# Altium PCB freedomport.PcbDoc
Units mil, origin at the board's own origin, x right, y up, seen from the top; angles counter-clockwise.
Board outline 685.04 x 582.68 mil, 4 copper layers (Top Layer, Layer 1, Layer 2, Bottom Layer), stack 42.156 mil thick; 26 components, 15 nets, 78 pads, 28 vias.
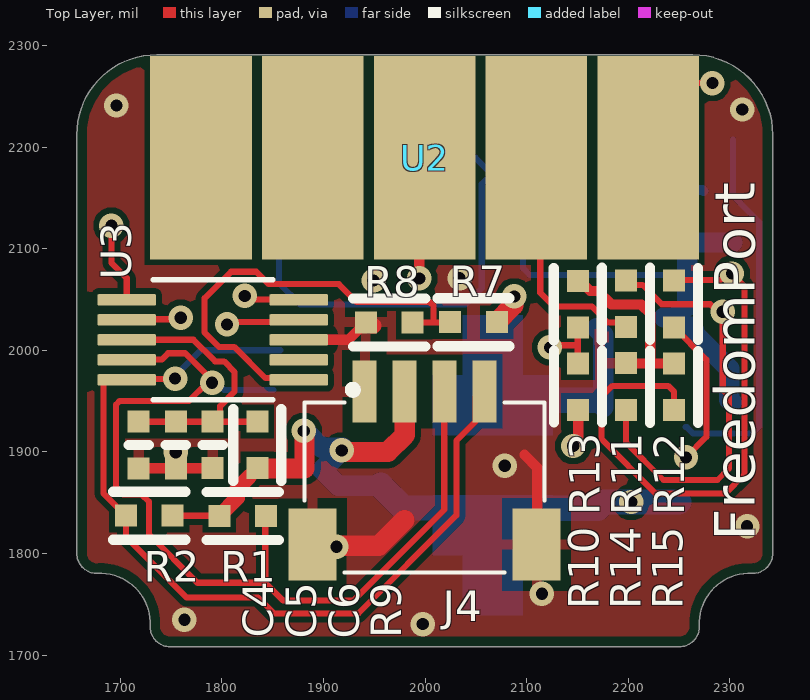
[diagram p0: Top Layer view]
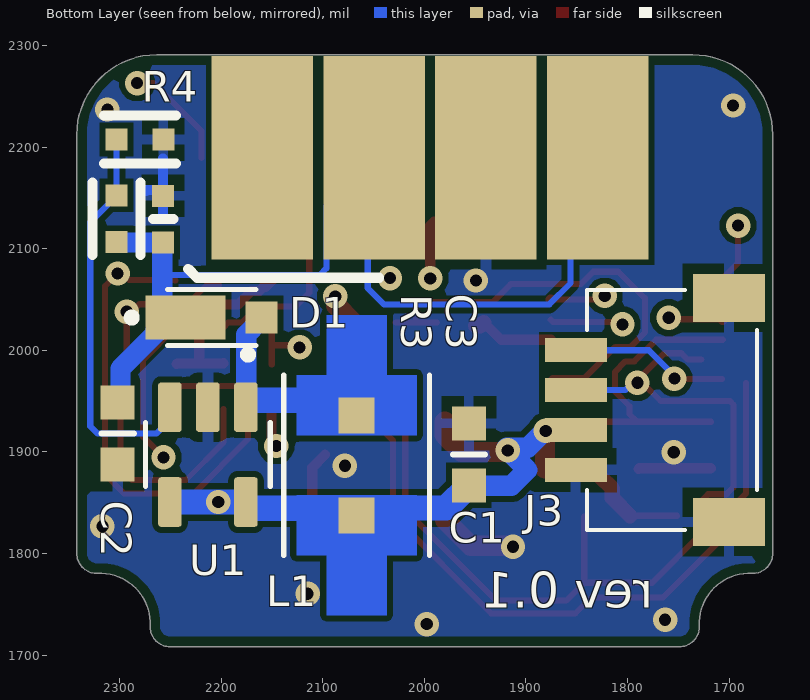
[diagram p1: Bottom Layer view, seen from below]
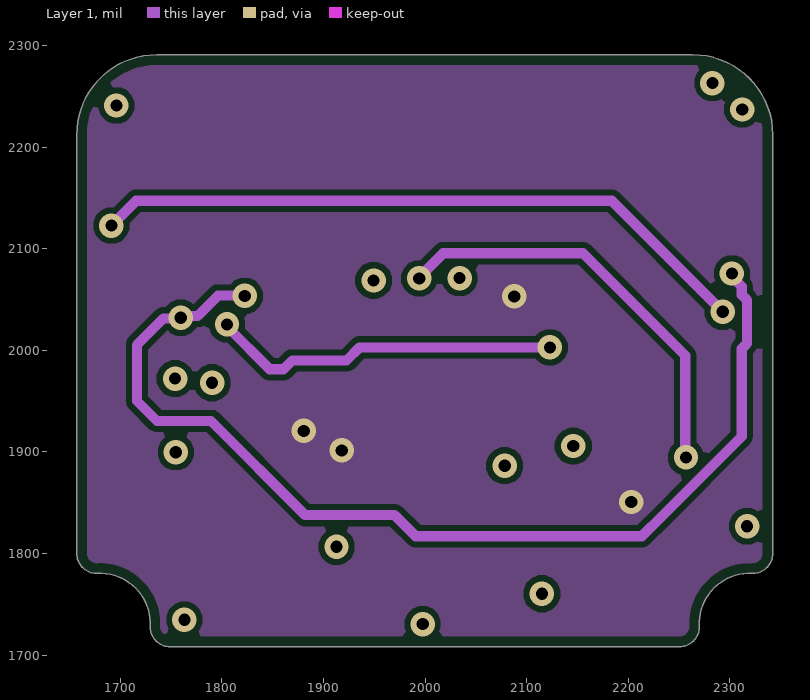
[diagram p2: Layer 1]
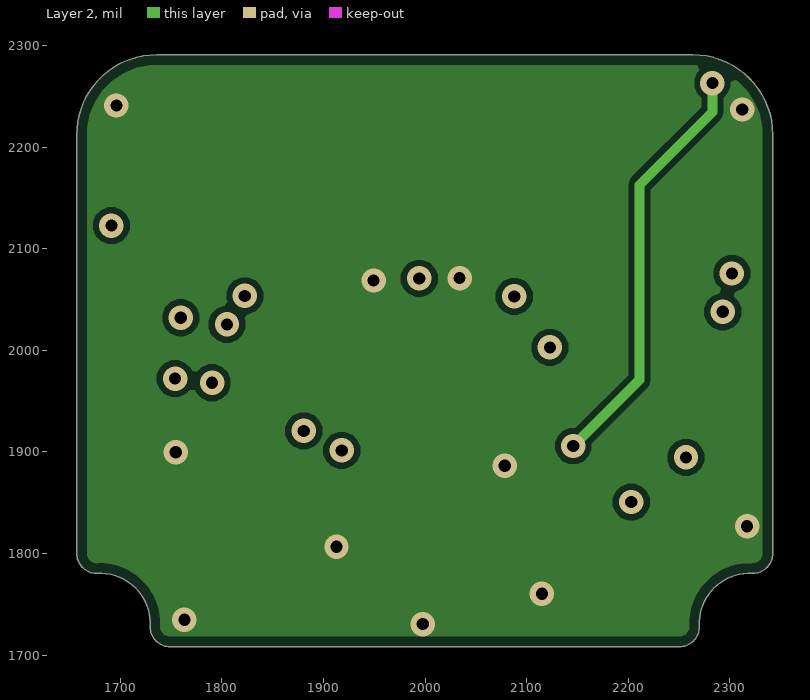
[diagram p3: Layer 2]
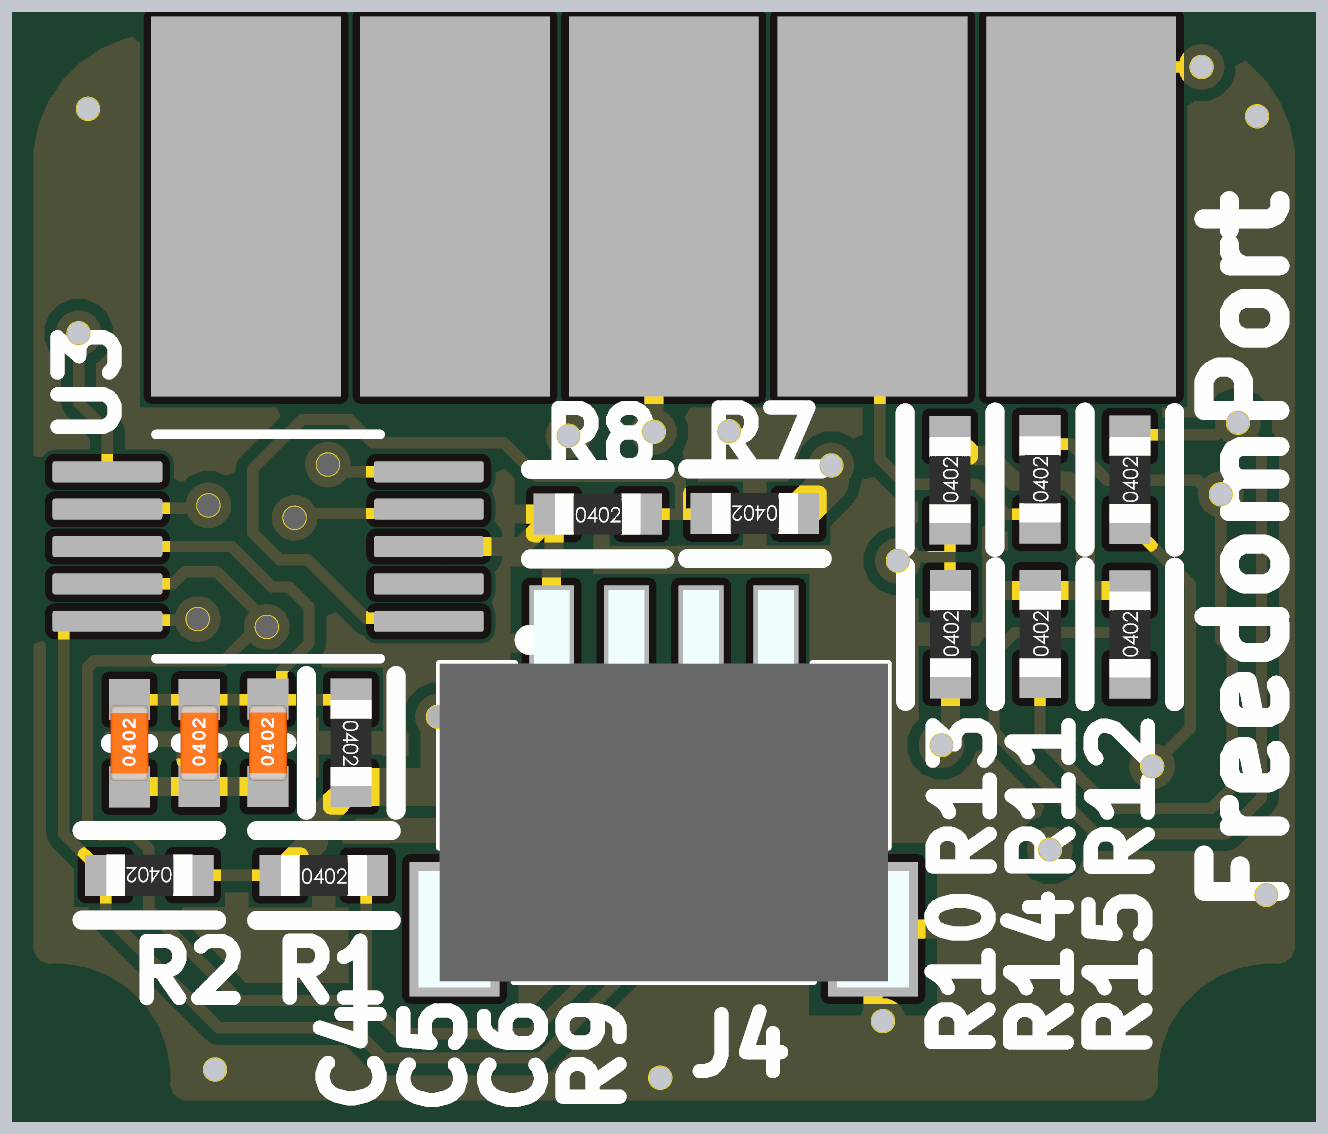
[diagram p4: 3D render of the assembled board from above, using the file's embedded part models]
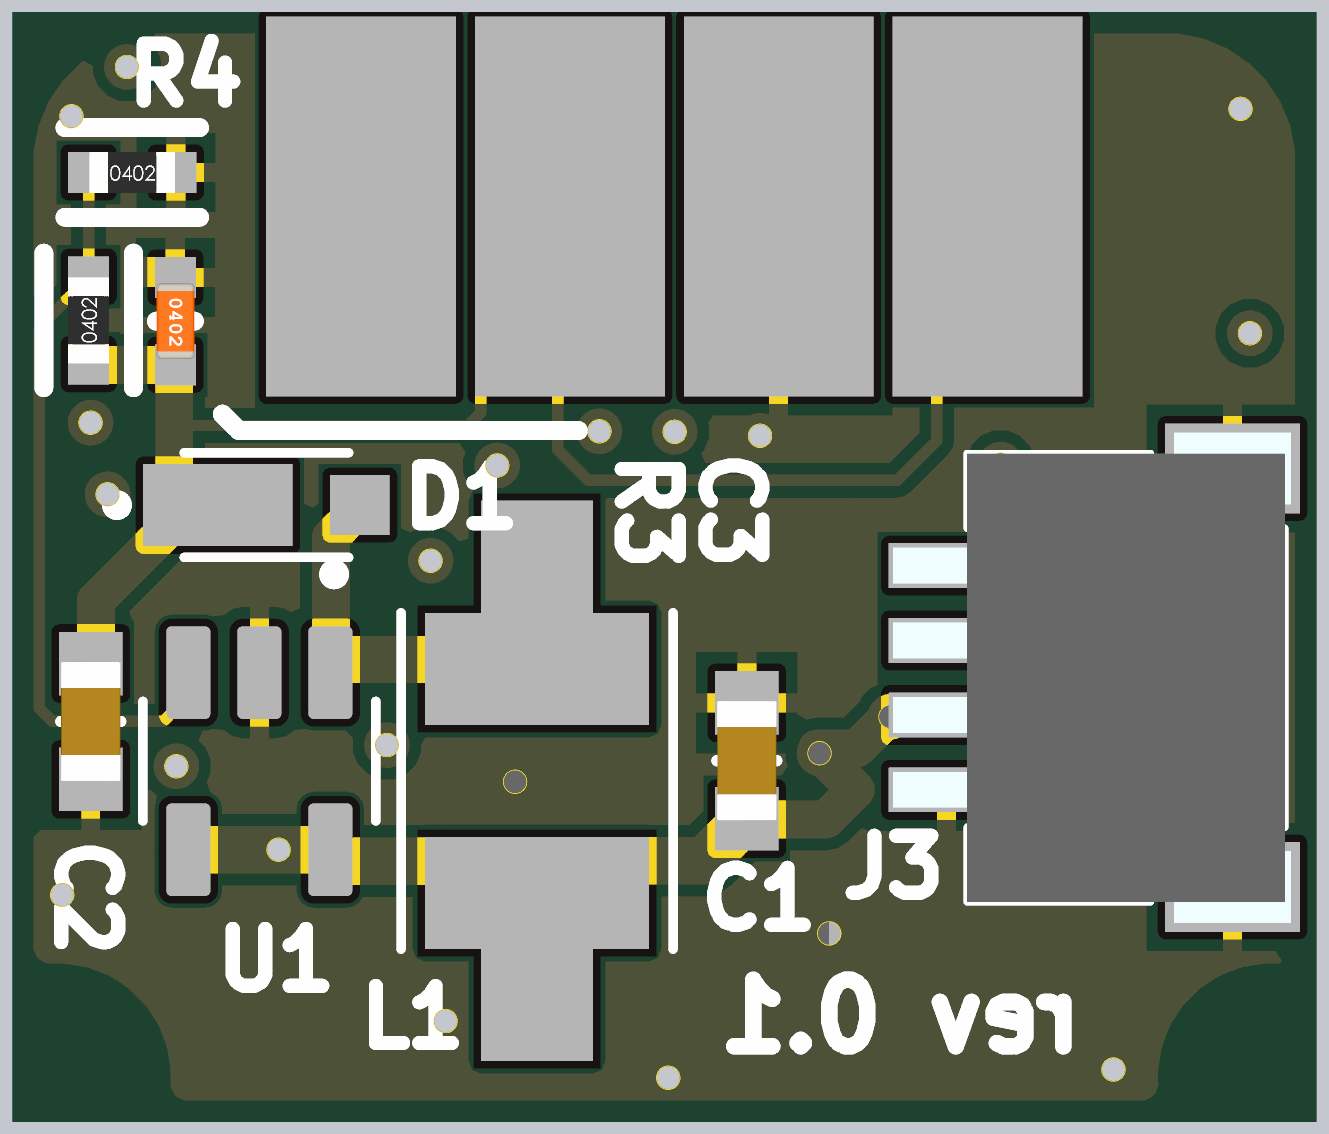
[diagram p5: 3D render of the assembled board from below, using the file's embedded part models]

## Layer stack, top to bottom
Top Solder: solder mask 0.4, Solder Resist, Dk 3.5
Top Layer: signal copper 1.4
Dielectric 2: prepreg 2.8, PP-006, Dk 4.1
Layer 1: signal copper 1.378
Dielectric 1: dielectric 31, FR-4, Dk 4.4
Layer 2: signal copper 1.378
Dielectric 3: prepreg 2.8, PP-006, Dk 4.1
Bottom Layer: signal copper 1.4
Bottom Solder: solder mask 0.4, Solder Resist, Dk 3.5

## Board outline
1677.76,1780.34 cw(c1676.79,1800) 1657.11,1800 1657.11,2212.06 cw(c1735.85,2212.06) 1735.85,2290.8 2263.41,2290.8 cw(c2263.41,2212.06) 2342.15,2212.06 2342.15,1800 cw(c2322.46,1800) 2321.5,1780.34 ccw(c2319.09,1731.18) 2269.93,1728.77 cw(c2250.27,1727.8) 2250.27,1708.12 1748.99,1708.12 cw(c1748.99,1727.8) 1729.33,1728.77 ccw(c1680.17,1731.18)

## Design rules (kind name [scope] priority, off if disabled: settings)
BoardOutlineClearance [All] p1: gap=10 ignorepadtopadclearanceinfootprint=FALSE except(0: Arc-SplitContinuation Track-SplitContinuation SMDPad-SplitContinuation THPad-SplitContinuation Via-SplitContinuation Fill-SplitContinuation Poly-SplitContinuation Region-SplitContinuation Text-SplitContinuation)
Clearance [All] p1: gap=6 ignorepadtopadclearanceinfootprint=FALSE
DiffPairsRouting [All] p1: maxlimit=8 minlimit=4 mostfreqgap=4 toplayer_minwidth=15 toplayer_maxwidth=25 toplayer_prefwidth=25 midlayer1_minwidth=15 midlayer1_maxwidth=25 midlayer1_prefwidth=25 midlayer2_minwidth=15 midlayer2_maxwidth=25 midlayer2_prefwidth=25 bottomlayer_minwidth=15 bottomlayer_maxwidth=25 bottomlayer_prefwidth=25 maxuncoupledlength=500
HoleSize [All] p1: absolutevalues=TRUE maxlimit=100 minlimit=7 maxpercent=80.000 minpercent=20.000
MinimumSolderMaskSliver [All] p1: minsoldermaskwidth=0
PolygonConnect PolygonConnect_1 [All] p1: thpad.connectstyle=Relief thpad.reliefconductorwidth=10 thpad.reliefentries=4 thpad.polygonreliefangle="90 Angle" thpad.airgapwidth=10 smdpad.connectstyle=Relief smdpad.reliefconductorwidth=10 smdpad.reliefentries=4 smdpad.polygonreliefangle="90 Angle" smdpad.airgapwidth=10 via.connectstyle=Direct via.reliefconductorwidth=10 via.reliefentries=4 via.polygonreliefangle="90 Angle" via.airgapwidth=10
RoutingVias [All] p1: holewidth=8 width=50 viastyle="Through Hole" minholewidth=7 minwidth=10 maxholewidth=28 maxwidth=50
SilkToSilkClearance [All] p1: silktosilkclearance=1
SilkToSolderMaskClearance [IsPad] p1: minsilkscreentomaskgap=1 clearancetoexposedcopper=TRUE
SolderMaskExpansion [All] p1: expansion=4 istentingtop=FALSE
Width [All] p1: maxlimit=100 minlimit=6 preferedwidth=10 toplayer_prefwidth=6 midlayer1_minwidth=10 midlayer1_maxwidth=10 midlayer2_minwidth=10 midlayer2_maxwidth=10 bottomlayer_prefwidth=6 minimp=50.000000 maximp=50.000000 favimp=50.000000
25 further rules are at their usual default settings.

## Components (designator, comment, footprint, x,y, rotation, side; value= is the part's Value field where it differs from the comment)
C1 "4.7µF" SMD-0603C 1956.23,1897.46 r0 bottom
C2 "10µF" SMD-0603C 2301.84,1918.13 r180 bottom
C3 "1µF" SMD-0402C 2257.25,2129 r0 bottom
C4 "1µF" SMD-0402C 1717.97,1906.63 r0 top
C5 "0.10µF" SMD-0402C 1754.75,1906.78 r0 top
C6 "4.7µF" SMD-0402C 1790.88,1906.86 r0 top
D1 "MSS1P4-M3/89A" DIODE_MSS1P4-M3/89A 2209.29,2032.12 r180 bottom
J3 "4208" 4208 1673.18,1940.17 r90 bottom
J4 "4208" 4208 1998.47,1781.6 r0 top
L1 "LQH43CN100K03L" IND_LQH43CN100K03L 2066.74,1886.77 r90 bottom
R1 "4.7k" SMD-0402-RES 1820.44,1836.98 r270 top
R2 "4.7k" SMD-0402-RES 1728.46,1837.08 r90 top
R3 "40.2k" SMD-0402-RES 2302.95,2129.38 r180 bottom
R4 "4.7k" SMD-0402-RES 2279.98,2207.36 r270 bottom
R7 "0.0" SMD-0402-RES 2047.49,2027.59 r90 top
R8 "0.0" SMD-0402-RES 1964.68,2027.35 r270 top
R9 "0.0" SMD-0402-RES 1834.78,1906.83 r180 top
R10 "124k" SMD-0402-RES 2150.5,1964.15 r0 top
R11 "124k" SMD-0402-RES 2197.65,2045.66 r0 top
R12 "124k" SMD-0402-RES 2245,2045.4 r0 top
R13 "47k" SMD-0402-RES 2150.24,2045.3 r0 top
R14 "47k" SMD-0402-RES 2197.8,1964.2 r0 top
R15 "47k" SMD-0402-RES 2244.98,1963.94 r0 top
U1 "MIC2288YD5-TR" SOT95P280X100-5N 2213.03,1897.21 r270 bottom
U2 "A-DS_9_LLZ" A-DS_9_LLZ 1999.42,2189.41 r270 top
U3 "ADS1015IDGST" SOP50P490X110-10N 1791,2010.27 r180 top

## Footprints (in the part's own frame and the unit in brackets; to place one, negate y for a bottom-side part, rotate by r counter-clockwise, add the part's x,y. Pads: shape width x height; smd on the part's side, far side on the other; paste and mask are expansions set on the pad)
4208 [mm]
  rect 0.6x1.55 smd: 1(-1.475,4.515) 2(-0.475,4.515) 3(0.525,4.515) 4(1.525,4.515)
  rect 1.2x1.8 smd: 5(-2.775,0.69) 6(2.825,0.69)
  silkscreen extent -2.97,-0.01 3.03,4.24, body extent -3.25,-0.09 3.31,5.23, height 3.15
A-DS_9_LLZ [mil]
  rect 200x100 smd: 1(0,220) 2(0,110) 3(0,0) 4(0,-110) 5(0,-220)
  rect 200x100 smd far side: 6(0,160) 7(0,50) 8(0,-60) 9(0,-170)
DIODE_MSS1P4-M3/89A [mm]
  rect 2x1.1 smd: 1(-0.65,0)
  rect 0.8x0.8 smd: 2(1.25,0)
  silkscreen extent -2.1,-0.7 1.1,0.7
IND_LQH43CN100K03L [mm]
  rect 0.9x0.9 smd paste-1 mask+0: 1(-1.25,0) 2(1.25,0)
  Top Layer region: -0.75,-1.5 -2.25,-1.5 -2.25,-0.75 -3.75,-0.75 -3.75,0.75 -2.25,0.75 -2.25,1.5 -0.75,1.5
  Top Layer region: 2.25,0.75 3.75,0.75 3.75,-0.75 2.25,-0.75 2.25,-1.5 0.75,-1.5 0.75,1.5 2.25,1.5
  silkscreen extent -2.25,-1.82 2.25,1.82
SMD-0402-RES [mm]
  rect 0.55x0.55 smd: 1(0,0.584) 2(0,-0.584)
  silkscreen extent -0.6,-0.9 0.6,0.9, body extent -0.28,-0.57 0.27,0.58, height 0.41
SMD-0402C [mm]
  rect 0.55x0.55 smd: 1(0,0.584) 2(0,-0.584)
  silkscreen extent -0.25,0 0.25,0, body extent -0.25,-0.51 0.25,0.51, height 0.51
SMD-0603C [mm]
  rect 0.85x0.85 smd: 1(0,0.775) 2(0,-0.775)
  silkscreen extent -0.4,0 0.4,0, body extent -0.4,-0.8 0.4,0.8, height 0.9
SOP50P490X110-10N [mm]
  rrect25% 1.47x0.28 smd: 1(-2.15,1) 2(-2.15,0.5) 3(-2.15,0) 4(-2.15,-0.5) 5(-2.15,-1) 6(2.15,-1) 7(2.15,-0.5) 8(2.15,0) 9(2.15,0.5) 10(2.15,1)
  silkscreen extent -3.6,-1.5 1.5,1.5
SOT95P280X100-5N [mm]
  rrect25% 1.24x0.59 smd: 1(-1.185,0.95) 2(-1.185,0) 3(-1.185,-0.95) 4(1.185,-0.95) 5(1.185,0.95)
  silkscreen extent -2.6,-1.56 0.8,1.56

## Part data
C1: library part GRM188R61C475KAAJD, "CAP CER 4.7UF 16V X5R 0603", Digi-Key Part Number=490-10481-1-ND, Manufacturer="Murata Electronics North America", Operating Temperature="-55°C ~ 85°C", Package / Case="0603 (1608 Metric)", Ratings=-, Temperature Coefficient=X5R, Tolerance=±10%, Voltage=16V, @ qty=0, Applications="General Purpose", Datasheets=http://www.murata.com/~/media/webrenewal/support/library/catalog/products/capacitor/mlcc/c02e.pdf, Factory Stock=0, Features="Derating Recommended", Height - Seated (Max)=-, Image=//media.digikey.com/Renders/Murata%20Renders/ZRB-SERIES-0402.jpg, Lead Spacing=-, Lead Style=-, Minimum Quantity=1, Mounting Type="Surface Mount, MLCC", Packaging="Cut Tape (CT)", Part Number=GRM188R61C475KAAJD, Part Status=Active, Quantity Available=5977, Series=GRM, Size / Dimension="0.063\" L x 0.031\" W (1.60mm x 0.80mm)", Thickness (Max)="0.037\" (0.95mm)", Unit Price (USD)=0.3
C2: library part GRM188R61E106MA73D, "CAP CER 10UF 25V X5R 0603", Digi-Key Part Number=490-7202-1-ND, Manufacturer="Murata Electronics North America", Operating Temperature="-55°C ~ 85°C", Package / Case="0603 (1608 Metric)", Ratings=-, Temperature Coefficient=X5R, Tolerance=±20%, Voltage=25V, @ qty=0, Applications="General Purpose", Datasheets=http://www.murata.com/~/media/webrenewal/support/library/catalog/products/capacitor/mlcc/c02e.pdf, Factory Stock=0, Features=-, Height - Seated (Max)=-, Image=//media.digikey.com/Renders/Murata%20Renders/ZRB-SERIES-0402.jpg, Lead Spacing=-, Lead Style=-, Minimum Quantity=1, Mounting Type="Surface Mount, MLCC", Packaging="Cut Tape (CT)", Part Number=GRM188R61E106MA73D, Part Status=Active, Quantity Available=169100, Series=GRM, Size / Dimension="0.063\" L x 0.031\" W (1.60mm x 0.80mm)", Thickness (Max)="0.031\" (0.80mm)", Unit Price (USD)=0.36
C3: library part GRM155R61E105KA12D, "CAP CER 1UF 25V X5R 0402", Digi-Key Part Number=490-10017-1-ND, Manufacturer="Murata Electronics North America", Operating Temperature="-55°C ~ 85°C", Package / Case="0402 (1005 Metric)", Ratings=-, Temperature Coefficient=X5R, Tolerance=±10%, Voltage=25V, @ qty=0, Applications="General Purpose", Datasheets=http://www.murata.com/~/media/webrenewal/support/library/catalog/products/capacitor/mlcc/c02e.pdf, Factory Stock=0, Features="Derating Recommended", Height - Seated (Max)=-, Image=//media.digikey.com/Renders/Murata%20Renders/ZRB-SERIES-0402.jpg, Lead Spacing=-, Lead Style=-, Minimum Quantity=1, Mounting Type="Surface Mount, MLCC", Packaging="Cut Tape (CT)", Part Number=GRM155R61E105KA12D, Part Status=Active, Quantity Available=2355, Series=GRM, Size / Dimension="0.039\" L x 0.020\" W (1.00mm x 0.50mm)", Thickness (Max)="0.022\" (0.55mm)", Unit Price (USD)=0.1
C4: library part GRM155R61A105KE15D, "CAP CER 1UF 10V X5R 0402", Digi-Key Part Number=490-3890-1-ND, Manufacturer="Murata Electronics North America", Operating Temperature="-55°C ~ 85°C", Package / Case="0402 (1005 Metric)", Ratings=-, Temperature Coefficient=X5R, Tolerance=±10%, Voltage=10V, @ qty=0, Applications="General Purpose", Datasheets=http://www.murata.com/~/media/webrenewal/support/library/catalog/products/capacitor/mlcc/c02e.pdf, Factory Stock=0, Features=-, Height - Seated (Max)=-, Image=//media.digikey.com/Renders/Murata%20Renders/ZRB-SERIES-0402.jpg, Lead Spacing=-, Lead Style=-, Minimum Quantity=1, Mounting Type="Surface Mount, MLCC", Packaging="Cut Tape (CT)", Part Number=GRM155R61A105KE15D, Part Status=Active, Quantity Available=6162668, Series=GRM, Size / Dimension="0.039\" L x 0.020\" W (1.00mm x 0.50mm)", Thickness (Max)="0.022\" (0.55mm)", Unit Price (USD)=0.1
C5: library part GRM152R61A104KE19D, "CAP CER 0.1UF 10V X5R 0402", Digi-Key Part Number=490-10008-1-ND, Manufacturer="Murata Electronics North America", Operating Temperature="-55°C ~ 85°C", Package / Case="0402 (1005 Metric)", Ratings=-, Temperature Coefficient=X5R, Tolerance=±10%, Voltage=10V, @ qty=0, Applications="General Purpose", Datasheets=http://www.murata.com/~/media/webrenewal/support/library/catalog/products/capacitor/mlcc/c02e.pdf, Factory Stock=0, Features="Derating Recommended", Height - Seated (Max)=-, Image=//media.digikey.com/Renders/Murata%20Renders/ZRB-SERIES-0402.jpg, Lead Spacing=-, Lead Style=-, Minimum Quantity=1, Mounting Type="Surface Mount, MLCC", Packaging="Cut Tape (CT)", Part Number=GRM152R61A104KE19D, Part Status=Active, Quantity Available=80241, Series=GRM, Size / Dimension="0.039\" L x 0.020\" W (1.00mm x 0.50mm)", Thickness (Max)="0.009\" (0.22mm)", Unit Price (USD)=0.16
C6: library part ZRB15XR61A475KE01D, "CAP CER 4.7UF 10V X5R 0402", Digi-Key Part Number=490-13252-1-ND, Manufacturer="Murata Electronics North America", Operating Temperature="-55°C ~ 85°C", Package / Case="0402 (1005 Metric)", Ratings=-, Temperature Coefficient=X5R, Tolerance=±10%, Voltage=10V, @ qty=0, Applications="Acoustic Noise Reduction", Datasheets=http://search.murata.co.jp/Ceramy/image/img/A01X/G101/ENG/ZRB15XR61A475KE01-01.pdf, Factory Stock=0, Features="Derating Recommended, Interposer Termination", Height - Seated (Max)=-, Image=//media.digikey.com/Renders/Murata%20Renders/ZRB-SERIES-0402.jpg, Lead Spacing=-, Lead Style=-, Minimum Quantity=1, Mounting Type="Surface Mount, MLCC", Packaging="Cut Tape (CT)", Part Number=ZRB15XR61A475KE01D, Part Status=Active, Quantity Available=23076, Series=ZRB, Size / Dimension="0.039\" L x 0.020\" W (1.00mm x 0.50mm)", Thickness (Max)="0.031\" (0.80mm)", Unit Price (USD)=0.28
D1: "Diode Schottky 40V 1A Surface Mount MicroSMP (DO-219AD)", Package="MicroSMP Vishay Semiconductor", Digi-Key_Part_Number=MSS1P4-M3/89AGICT-ND, MF=Vishay, MP=MSS1P4-M3/89A, SnapEDA_Link=https://www.snapeda.com/parts/MSS1P4-M3/89A/Vishay%20Semiconductor%20Diodes%20Division/view-part/543169/?ref=snap
L1: "Inductor with Inductance: 10uH Tol. +/-10%, Package: 1812 _4532_", Package=NONSTANDARD, Availability=Unavailable, MF=Murata, MP=LQH43CN100K03L, Price=None, SnapEDA_Link=https://www.snapeda.com/parts/LQH43CN100K03L/Murata/view-part/4546965/?ref=snap
R1 R2: library part ERJ-2GEJ472X, "RES SMD 4.7K OHM 5% 1/10W 0402", Digi-Key Part Number=P4.7KJCT-ND, Manufacturer="Panasonic Electronic Components", Operating Temperature="-55°C ~ 155°C", Package / Case="0402 (1005 Metric)", Power (Watts)="0.1W, 1/10W", Supplier Device Package=0402, Temperature Coefficient=±200ppm/°C, Tolerance=±5%, @ qty=1500, Composition="Thick Film", Datasheets=http://industrial.panasonic.com/www-cgi/jvcr13pz.cgi?E+PZ+3+AOA0001+ERJ2GEJ472X+7+WW, Factory Stock=0, Failure Rate=-, Features="Automotive AEC-Q200", Height - Seated (Max)="0.016\" (0.40mm)", Image=//media.digikey.com/Photos/Panasonic%20Photos/ERJ-PA2-Series.jpg, Minimum Quantity=1, Number of Terminations=2, Packaging="Cut Tape (CT)", Part Number=ERJ-2GEJ472X, Part Status=Active, Quantity Available=8551774, Series=ERJ, Size / Dimension="0.039\" L x 0.020\" W (1.00mm x 0.50mm)", Unit Price (USD)=0.00350
R3: library part ERJ-2RKF4022X, "RES SMD 40.2K OHM 1% 1/10W 0402", Digi-Key Part Number=P40.2KLCT-ND, Manufacturer="Panasonic Electronic Components", Operating Temperature="-55°C ~ 155°C", Package / Case="0402 (1005 Metric)", Power (Watts)="0.1W, 1/10W", Supplier Device Package=0402, Temperature Coefficient=±100ppm/°C, Tolerance=±1%, @ qty=1500, Composition="Thick Film", Datasheets=http://industrial.panasonic.com/www-cgi/jvcr13pz.cgi?E+PZ+3+AOA0002+ERJ2RKF4022X+7+WW, Factory Stock=0, Failure Rate=-, Features="Automotive AEC-Q200", Height - Seated (Max)="0.016\" (0.40mm)", Image=//media.digikey.com/Photos/Panasonic%20Photos/ERJ-PA2-Series.jpg, Minimum Quantity=1, Number of Terminations=2, Packaging="Cut Tape (CT)", Part Number=ERJ-2RKF4022X, Part Status=Active, Quantity Available=272146, Series=ERJ, Size / Dimension="0.039\" L x 0.020\" W (1.00mm x 0.50mm)", Unit Price (USD)=0.00496
R4: library part ERJ-2RKF4701X, "RES SMD 4.7K OHM 1% 1/10W 0402", Digi-Key Part Number=P4.70KLCT-ND, Manufacturer="Panasonic Electronic Components", Operating Temperature="-55°C ~ 155°C", Package / Case="0402 (1005 Metric)", Power (Watts)="0.1W, 1/10W", Supplier Device Package=0402, Temperature Coefficient=±100ppm/°C, Tolerance=±1%, @ qty=1500, Composition="Thick Film", Datasheets=http://industrial.panasonic.com/www-cgi/jvcr13pz.cgi?E+PZ+3+AOA0002+ERJ2RKF4701X+7+WW, Factory Stock=0, Failure Rate=-, Features="Automotive AEC-Q200", Height - Seated (Max)="0.016\" (0.40mm)", Image=//media.digikey.com/Photos/Panasonic%20Photos/ERJ-PA2-Series.jpg, Minimum Quantity=1, Number of Terminations=2, Packaging="Cut Tape (CT)", Part Number=ERJ-2RKF4701X, Part Status=Active, Quantity Available=1881807, Series=ERJ, Size / Dimension="0.039\" L x 0.020\" W (1.00mm x 0.50mm)", Unit Price (USD)=0.00496
R7 R8 R9: library part ERJ-2GE0R00X, "RES SMD 0.0OHM JUMPER 1/10W 0402", Digi-Key Part Number=P0.0JCT-ND, Manufacturer="Panasonic Electronic Components", Operating Temperature="-55°C ~ 155°C", Package / Case="0402 (1005 Metric)", Power (Watts)="0.1W, 1/10W", Supplier Device Package=0402, Temperature Coefficient=-, Tolerance=Jumper, @ qty=1500, Composition="Thick Film", Datasheets=http://industrial.panasonic.com/www-cgi/jvcr13pz.cgi?E+PZ+3+AOA0001+ERJ2GE0R00X+7+WW, Factory Stock=0, Failure Rate=-, Features="Automotive AEC-Q200", Height - Seated (Max)="0.016\" (0.40mm)", Image=//media.digikey.com/Photos/Panasonic%20Photos/ERJ-PA2-Series.jpg, Minimum Quantity=1, Number of Terminations=2, Packaging="Cut Tape (CT)", Part Number=ERJ-2GE0R00X, Part Status=Active, Quantity Available=3152483, Series=ERJ, Size / Dimension="0.039\" L x 0.020\" W (1.00mm x 0.50mm)", Unit Price (USD)=0.00384
R10 R11 R12: library part ERJ-2RKF1243X, "RES SMD 124K OHM 1% 1/10W 0402", Digi-Key Part Number=P124KLCT-ND, Manufacturer="Panasonic Electronic Components", Operating Temperature="-55°C ~ 155°C", Package / Case="0402 (1005 Metric)", Power (Watts)="0.1W, 1/10W", Supplier Device Package=0402, Temperature Coefficient=±100ppm/°C, Tolerance=±1%, @ qty=1500, Composition="Thick Film", Datasheets=http://industrial.panasonic.com/www-cgi/jvcr13pz.cgi?E+PZ+3+AOA0002+ERJ2RKF1243X+7+WW, Factory Stock=0, Failure Rate=-, Features="Automotive AEC-Q200", Height - Seated (Max)="0.016\" (0.40mm)", Image=//media.digikey.com/Photos/Panasonic%20Photos/ERJ-PA2-Series.jpg, Minimum Quantity=1, Number of Terminations=2, Packaging="Cut Tape (CT)", Part Number=ERJ-2RKF1243X, Part Status=Active, Quantity Available=190703, Series=ERJ, Size / Dimension="0.039\" L x 0.020\" W (1.00mm x 0.50mm)", Unit Price (USD)=0.00496
R13 R14 R15: library part ERJ-2RKF4702X, "RES SMD 47K OHM 1% 1/10W 0402", Digi-Key Part Number=P47.0KLCT-ND, Manufacturer="Panasonic Electronic Components", Operating Temperature="-55°C ~ 155°C", Package / Case="0402 (1005 Metric)", Power (Watts)="0.1W, 1/10W", Supplier Device Package=0402, Temperature Coefficient=±100ppm/°C, Tolerance=±1%, @ qty=1500, Composition="Thick Film", Datasheets=http://industrial.panasonic.com/www-cgi/jvcr13pz.cgi?E+PZ+3+AOA0002+ERJ2RKF4702X+7+WW, Factory Stock=0, Failure Rate=-, Features="Automotive AEC-Q200", Height - Seated (Max)="0.016\" (0.40mm)", Image=//media.digikey.com/Photos/Panasonic%20Photos/ERJ-PA2-Series.jpg, Minimum Quantity=1, Number of Terminations=2, Packaging="Cut Tape (CT)", Part Number=ERJ-2RKF4702X, Part Status=Active, Quantity Available=230515, Series=ERJ, Size / Dimension="0.039\" L x 0.020\" W (1.00mm x 0.50mm)", Unit Price (USD)=0.00496
U1: "Boost Switching Regulator IC Positive Adjustable 2.5V 1 Output 1.2A _Switch_ SOT-23-5 Thin, TSOT-23-5", Package="TSOT-23 Microchip", Availability=Unavailable, MF=Microchip, MP=MIC2288YD5-TR, Price=None, SnapEDA_Link=https://www.snapeda.com/parts/MIC2288YD5-TR/Microchip/view-part/552767/?ref=snap
U3: "12-Bit, 3.3kSPS, 4-Ch Delta-Sigma ADC With PGA, Oscillator, VREF, Comparator and I2C Interface 10-VSSOP -40 to 125", Package="VSSOP-10 Texas Instruments", Availability=Good, BuyPart=https://www.snapeda.com/parts/ADS1015IDGST/Texas%20Instruments/view-part/425936/?ref=eda, DigiKey-Purchase-URL=https://snapeda.com/shop?store=DigiKey&id=425936, MF="Texas Instruments", Mouser-Purchase-URL=https://snapeda.com/shop?store=Mouser&id=425936, MP=ADS1015IDGST, Price=None, SnapEDA_Link=https://www.snapeda.com/parts/ADS1015IDGST/Texas%20Instruments/view-part/425936/?ref=snap, Texas_Instruments-Purchase-URL=https://snapeda.com/shop?store=Texas+Instruments&id=425936

## Via types
v1: diameter 24, hole 12, Top Layer to Bottom Layer, tented both sides, 28 vias

## Nets (pads, with @x,y where several pads share a name; then routed paths per layer and width w, separated by ;. In a path a pad name is that pad's centre, name@x,y a point inside that pad or via, vN(x,y) a via of type N, cw(c..) or ccw(c..) an arc to the next point about the centre after c; other vN are vias at no path point)
GND: C1.2 C2.2 C3.2 C4.2 C5.2 C6.2 J3.1 J3.5 J3.6 J4.1 J4.5 J4.6 R4.1 R8.2 R13.1 R14.1 R15.1 U1.2 U2.8 U3.3 | length 575.1
  Top Layer w10: C4.2 1718.09,1883.74 1788.69,1883.74 C6.2@1789.4,1883.03 ; U3.3 1924.6,2010.27 R8.2 ; 2097.8,1897.07 2110.42,1884.46 J4.6@2110.42,1808.57 ; R13.1 2156.07,2062.47 2158.28,2062.47 2162.51,2058.25 2170.12,2058.25 2183.53,2044.84 2212.85,2044.84 2221.63,2036.06 2221.63,1990.04 2221.78,1989.89 ; R14.1 2197.93,1987.07 2243.32,1987.07 R15.1@2244.1,1986.3
  Top Layer w15: R8.2 1945.01,2024.03 R8.2@1949.58,2024.03
  Top Layer w20: v1(1912.79,1806.47) 1913.87,1806.47 1914.9,1807.5 1954.32,1807.5 1979.65,1832.84
  Bottom Layer w10: 2257.23,2188.55 2257.37,2188.42 2257.37,2133.34 ; C3.2@2257.92,2157.82 2272.96,2157.82 2274.01,2156.77
  other v1: 1997.59,1730.42 1763.06,1734.75 2114.93,1760.27 2316.89,1826.73 2078.28,1886.36 1754.61,1899.65 1949.26,2068.63 2033.88,2070.98 2312.04,2236.93 1696.13,2240.86
JS_REF: R12.1 R15.2 U3.5 U3.7 | length 1708.4
  Top Layer w6: U3.7@1706.87,2030.47 v1@1758.47,2030.47 ; v1@1830.04,2049.75 U3.5@1875.54,2049.75 ; R15.2@2245.06,1938.49 2245.06,1959.11 2239.2,1964.97 2184.26,1964.97 2173.45,1954.16 2173.45,1912.65 2227.16,1858.94 2295.53,1858.94 2314.34,1877.75 2314.34,2063.13 v1(2301.95,2075.53) ; R12.1@2245.23,2068.62 2245.81,2069.2 2290.75,2069.2 2296.73,2075.18 v1@2301.6,2075.18
  Top Layer w10: U3.7 U3.7@1706.87,2030.47 ; v1(1822.52,2053.48) v1@1826.31,2053.48 ; U3.5@1875.54,2049.75 U3.5
  Layer 1 w10: v1@1751.32,2031.36 1742.42,2031.36 1716.34,2005.28 1716.34,1950.09 1736.06,1930.37 1789.2,1930.37 1881.9,1837.67 1969.98,1837.67 1990.82,1816.82 2213.35,1816.82 2234.2,1837.67 2311.66,1915.14 2311.66,1980.95 2311.6,1981.01 2311.6,2001.42 2316.64,2006.45 2316.64,2049.53 2311.6,2054.56 2311.6,2062.67 2301.95,2072.32 v1(2301.95,2075.53) ; v1(1759.56,2031.96) 1761.21,2033.61 1776.09,2033.61 1796.39,2053.91 1822.09,2053.91 v1(1822.52,2053.48)
JS_X: R11.1 R14.2 U3.6 | length 1149.2
  Top Layer w6: v1(1691.19,2122.63) 1691.19,2086.08 1706.35,2070.92 U3.6 ; R14.2@2197.66,1942.07 2197.66,1909.22 2234.63,1872.24 2287.74,1872.24 2299.01,1883.52 2299.01,1955.18 2292.96,1961.24 v1(2292.96,2037.77) 2288.09,2037.77 2280.59,2045.27 2232.92,2045.27 2213.96,2064.23 R11.1@2202.07,2064.23
  Layer 1 w10: v1(1691.19,2122.63) 1715.59,2147.03 2183.7,2147.03 v1(2292.96,2037.77)
JS_Y: R10.1 R13.2 U3.4 | length 484.5
  Top Layer w6: v1(1804.97,2025.4) 1807.25,2027.68 1873.37,2027.68 U3.4 ; v1(2122.8,2002.79) 2124.92,2004.9 2149.78,2004.9 ; R10.1@2150.24,1986.02 R13.2
  Layer 1 w10: v1(1804.97,2025.4) 1804.97,2023.3 1847.08,1981.19 1860.57,1981.19 1869.29,1989.91 1922.63,1989.91 1935.51,2002.79 2119.64,2002.79 v1@2120.27,2003.42 ; v1(2122.8,2002.79) v1@2125.48,2005.47
NetC4_1: C4.1 C5.1 C6.1 R9.2 U3.8 | length 289.7
  Top Layer w6: U3.8 1771.91,2010.27 1793.23,1988.94 1802.07,1988.94 1812.54,1978.48 1812.54,1959.4 1798.13,1944.99 1798.13,1937.12 C6.1 ; C4.1 1754.75,1929.63 1790.88,1929.63 R9.2@1830.7,1929.63
NetD1_2: D1.2 L1.2 U1.1 | length 183.7
  Bottom Layer w6: L1.2@2066.61,1952.7 2114.24,1952.7 2116.17,1950.77
  Bottom Layer w20: D1.2@2168.84,2021.82 2175.23,2015.43 2175.23,1944.26 U1.1
  Bottom Layer w25: 2116.17,1950.77 U1.1@2168.72,1950.77
NetR3_1: R3.1 R4.2 U1.3 | length 370.8
  Bottom Layer w6: U1.3@2256.48,1924.24 2257.48,1924.24 2263.57,1918.15 2321.89,1918.15 2328.89,1925.15 2328.89,2125.95 2310.78,2144.06 2310.78,2144.55 R3.1 R4.2@2302.95,2207.33
NetR7_1: R7.1 R8.1 U3.1 | length 450.9
  Top Layer w6: U3.1 1874.06,1972.49 1842.87,1972.49 1812.03,2003.32 1797.01,2003.32 1783,2017.34 1783,2051.17 1809.05,2077.22 1833.78,2077.22 1846.03,2064.97 1915.07,2064.97 1932.66,2047.38 2004.74,2047.38 2008.26,2043.87 2008.26,2028.98 ; R8.1 2008.26,2027.35 R7.1@2028.16,2027.35
NetR10_2: R10.2 U2.1 | length 563
  Top Layer w6: U2.1 2219.42,2215.93 2266.42,2262.93 v1(2282.77,2262.93)
  Top Layer w10: v1(2145.8,1905.68) 2145.8,1909.47 2150.64,1914.31 2150.64,1941.02 R10.2
  Layer 1 w10: v1@2142.46,1905.68 v1(2145.8,1905.68)
  Layer 2 w10: v1@2146.86,1906.41 2146.86,1906.74 2211.04,1970.92 2211.04,2162.65 2282.77,2234.38 v1(2282.77,2262.93)
NetR11_2: R11.2 U2.2 | length 155.3
  Top Layer w6: U2.2@2113.3,2111.15 2113.3,2056.57 2126.79,2043.08 2163.98,2043.08 2179.78,2027.28 2193.02,2027.28 R11.2 ; U2.2@2125.15,2109.7 U2.2@2126.79,2108.05
NetR12_2: R12.2 U2.3 | length 620.7
  Top Layer w6: R12.2 2276.84,1990.56 2276.84,1914.6 v1(2256.74,1894.51)
  Top Layer w10: U2.3@1990.3,2126.62 1994.23,2122.68 v1(1994.23,2070.71)
  Layer 1 w10: v1(1994.23,2070.71) 1994.23,2071.84 2017.76,2095.37 2155.36,2095.37 2256,1994.73 v1@2256,1895.26
SCL: J3.4 J4.4 R2.1 U3.10 | length 858.3
  Top Layer w6: U3.10@1683.31,1967.68 1683.31,1859.06 1697.47,1844.9 1697.64,1844.9 R2.1 1705.46,1816.37 1765.05,1756.79 1835.49,1756.79 1851.42,1740.85 1934.31,1740.85 2030.84,1837.38 2030.84,1911.04 2049.72,1929.91 2049.72,1954.46 J4.4@2058.43,1963.17 ; U3.10@1706.94,1971.49 1753.31,1971.49 v1(1753.9,1972.07)
  Bottom Layer w6: v1(1753.9,1972.07) 1753.9,1974.75 1779.13,1999.98 J3.4@1857.42,1999.98
SDA: J3.3 J4.3 R1.1 U3.9 | length 935.7
  Top Layer w6: 1702.19,1858.62 1695.87,1864.94 1695.87,1946.58 1699.38,1950.09 1767.6,1950.09 1785.46,1967.95 v1(1790.33,1967.95) 1790.33,1970.44 1763.75,1997.02 1747.1,1997.02 1740.8,1990.72 U3.9@1727.46,1990.72 ; 1702.5,1858.21 1720.81,1858.21 1728.21,1850.8 1728.21,1818.72 1775.8,1771.13 1842.66,1771.13 ; R1.1@1842.92,1836.1 1842.66,1835.83 1842.66,1771.13 ; J4.3@2018.83,1961.86 2018.83,1843.12 1929.34,1753.62 1860.16,1753.62 1842.66,1771.13
  Bottom Layer w6: v1(1790.33,1967.95) 1795.2,1967.95 1802.29,1960.86 J3.3
VDD_3V3: C1.1 J3.2 J4.2 L1.1 R1.2 R2.2 R7.2 R9.1 U1.4 U1.5 | length 754.4
  Top Layer w6: R2.2 1797.54,1837.08 R1.2 ; R9.1@1826.96,1875.75 1826.96,1876 R9.1@1832.95,1882
  Top Layer w15: R1.2@1797.54,1837.08 1815.02,1854.56 1815.02,1863.82 R9.1@1826.96,1875.75
  Top Layer w20: R9.1@1835.23,1883.62 1881.28,1883.62 1881.28,1898.75 ; v1(1880.51,1920.61) 1881.27,1919.84 1881.27,1898.76 ; v1@1917.91,1899.86 1963.37,1899.86 1980.04,1916.53 J4.2@1980.04,1929.6 ; R7.2 2086.95,2044.05 2086.95,2051.25 v1@2089.01,2053.31
  Bottom Layer w6: L1.1@2071.01,1840.15 2073.63,1842.77 L1.1@2081.41,1850.55
  Bottom Layer w20: v1(1880.51,1920.61) 1881.59,1920.61 1898.34,1903.86 v1@1919.23,1903.86 ; 1901.41,1882.06 1901.41,1883.81 ; v1@1917.54,1900.82 1898.84,1882.12 1914.44,1866.52 C1.1@1955.21,1866.52
  Bottom Layer w25: C1.1 1978.44,1844.73 L1.1@2061.73,1844.73 ; L1.1 L1.1@2071.96,1842.77 ; L1.1@2073.78,1844.59 L1.1@2071.96,1842.77 ; U1.5@2169.77,1844.59 2086.6,1844.59 2084.78,1842.77 2073.63,1842.77 L1.1@2071.96,1842.77 ; U1.5@2174.74,1848.81 2175.63,1849.69 U1.5 ; U1.5@2176.51,1850.58 v1(2202.88,1850.58) ; v1(2202.88,1850.58) U1.4@2249.55,1850.55
  other v1: 1917.91,1901.39 2087.71,2052.98
VJS_12V0: C2.1 C3.1 D1.1 R3.2 U2.7 U2.9 | length 895.9
  Bottom Layer w6: U2.9@1856.16,2111.31 1856.16,2066.05 1877.07,2045.15 2039.84,2045.15 2055.74,2061.05 2055.74,2163.5 U2.7@2065.54,2173.3 ; U2.7 U2.7@2065.54,2173.3 ; 2255.84,2077.36 2252.5,2074.02 2102.92,2074.02 2096.42,2080.51 2096.42,2142.41 U2.7@2065.54,2173.3 ; C3.1@2257.23,2105.95 C3.1@2257.3,2105.95 ; C3.1 C3.1@2257.3,2105.95 ; C3.1@2257.86,2105.38 C3.1@2257.3,2105.95 ; C2.1@2301.67,1948.81 C2.1 ; R3.2@2302.52,2105.95 R3.2
  Bottom Layer w20: D1.1 2245.7,2032.12 D1.1@2257.36,2043.77 ; C3.1@2257.3,2105.95 R3.2@2302.52,2105.95 ; D1.1@2257.86,2043.25 C3.1@2257.86,2105.38 ; D1.1@2261.4,2023.31 2264.25,2020.46 2264.25,2016.8 2299.19,1981.87 2299.19,1951.29 C2.1@2301.67,1948.81
pads on no net: U2.4 U2.5 U2.6 U3.2

## Polygon pours and split planes (outlines as drawn)
VDD_3V3 on Layer 1 "NONET_L-01_P-001" (solid, pour order 0): 1645.83,2308.26 1646.46,2308.9 2359.67,2308.9 2359.67,1687.86 2360.94,1686.59 2358.39,1684.05 1636.29,1684.05 1636.29,2305.23 1639.89,2308.83 1640.22,2308.5 1645.15,2308.5
GND on Layer 2 "NONET_L-01_P-001" (solid, pour order 1): 1656.65,2297.92 1657.28,2298.56 2370.49,2298.56 2370.49,1677.52 2371.76,1676.25 2369.21,1673.71 1647.11,1673.71 1647.11,2294.88 1650.71,2298.49 1651.04,2298.16 1655.97,2298.16
GND on Bottom Layer "NONET_L-01_P-001" (solid, pour order 3): 1644.58,2308.26 1645.22,2308.9 2358.42,2308.9 2358.42,1687.86 2359.69,1686.59 2357.15,1684.05 1635.04,1684.05 1635.04,2305.23 1638.65,2308.83 1638.98,2308.5 1643.9,2308.5
GND on Top Layer "NONET_L-01_P-001" (solid, pour order 2): 1644.58,2304.52 1645.22,2305.16 2358.42,2305.16 2358.42,1684.12 2359.69,1682.85 2357.15,1680.31 1635.04,1680.31 1635.04,2301.49 1638.65,2305.09 1638.98,2304.76 1643.9,2304.76

## Silkscreen, mask and mechanical layers (free items; w line width, h text height)
Top Overlay:
  text "FreedomPort" at 2324.56,1812.56 h40 r90
Bottom Overlay:
  lines w10: 2044.98,2071.37 2223.87,2071.37 2232.53,2080.04
  text "rev 0.1" at 1774.57,1746.51 h35
Mechanical 1:
  circle w0.5: c2000,1421.26 r39.37
  circle w0.5: c1409.45,2000 r64.96
  circle w0.5: c2000,2578.74 r39.37
  circle w0.5: c2311.02,2000 r64.96
Outline:
  the board outline again, w0.5